# Altium PCB LedModulePCB.PcbDoc
Units mm, origin at the board's own origin, x right, y up, seen from the top; angles counter-clockwise.
Board outline 67.44 x 43.06 mm, 2 copper layers (Top Layer, Bottom Layer); 54 components, 37 nets, 191 pads, 19 vias.
Unrouted connection lines stored in the file: 124.
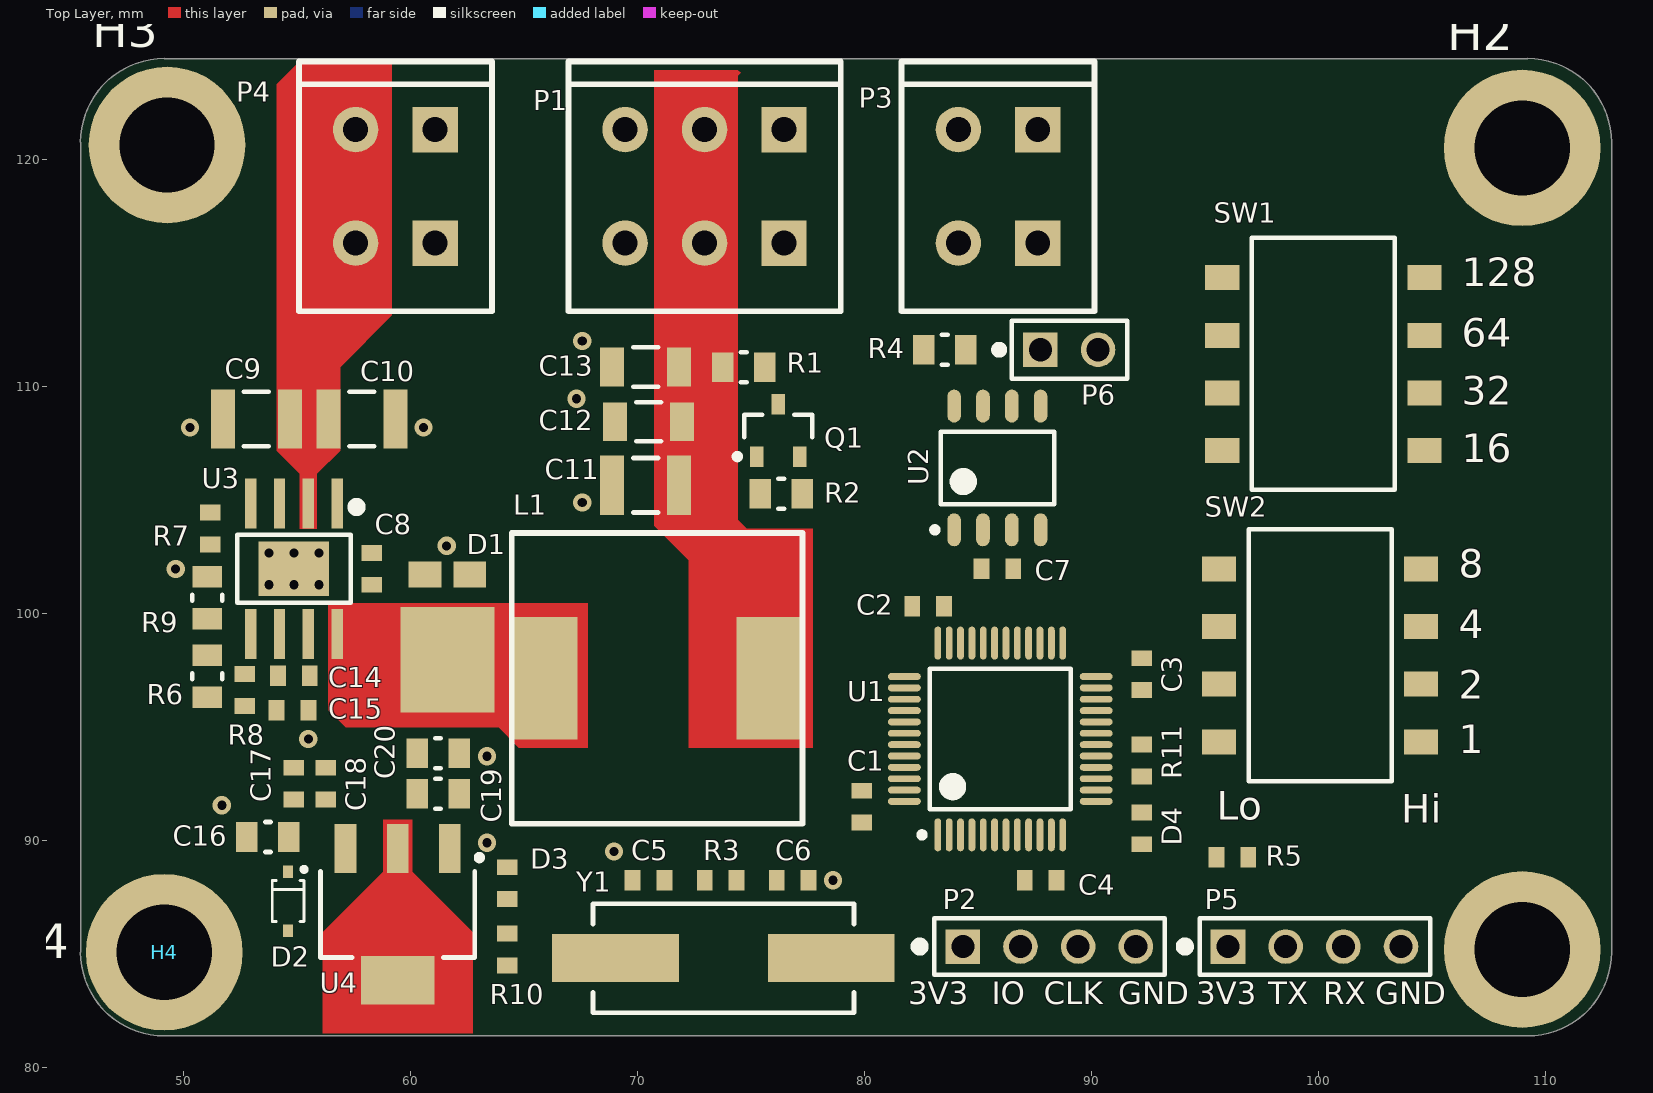
[diagram p0: Top Layer view]
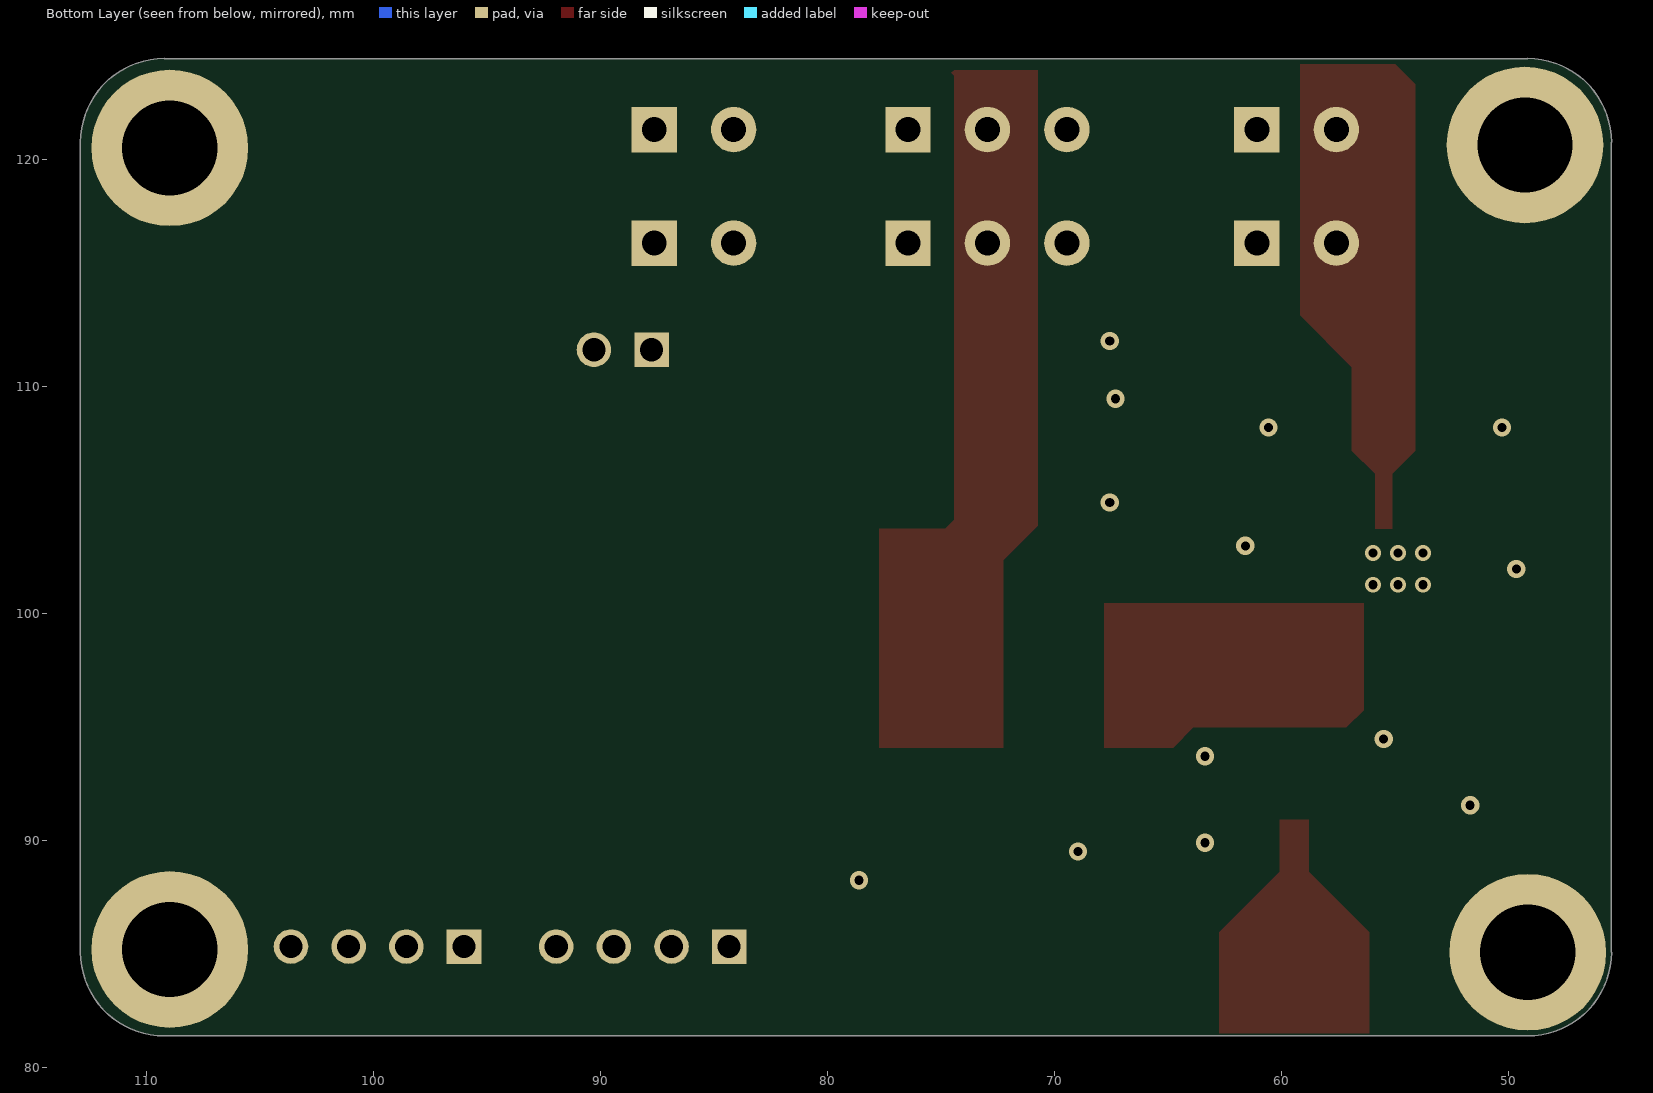
[diagram p1: Bottom Layer view, seen from below]

## Layer stack, top to bottom
Top Solder: solder mask 0.0102, Solder Resist, Dk 3.5
Top Layer: signal copper 0.0356
Dielectric 1: dielectric 0.32, FR-4, Dk 4.8
Bottom Layer: signal copper 0.0356
Bottom Solder: solder mask 0.0102, Solder Resist, Dk 3.5

## Board outline
45.466,85.09 45.466,120.777 45.464,120.777 cw(c49.149,120.777) 49.149,124.462 49.149,124.46 109.218,124.46 109.218,124.462 cw(c109.218,120.777) 112.903,120.777 112.903,85.09 cw(c109.218,85.09) 109.218,81.405 109.22,81.407 49.149,81.407 49.149,81.405 cw(c49.149,85.09)

## Design rules (kind name [scope] priority, off if disabled: settings)
Clearance [All] p1: gap=0.254 ignorepadtopadclearanceinfootprint=FALSE except(0: Arc-Hole Track-Hole SMDPad-Hole THPad-Hole Via-Hole Fill-Hole Poly-Hole Region-Hole Text-Hole; 0.152: Arc-Arc Arc-Track Arc-SMDPad Arc-THPad Arc-Via Track-Track Track-SMDPad Track-THPad Track-Via SMDPad-SMDPad SMDPad-THPad SMDPad-Via THPad-THPad THPad-Via Via-Via)
PolygonConnect [All] p1: connectstyle=Relief reliefconductorwidth=0.254 reliefentries=4 polygonreliefangle="90 Angle" airgapwidth=0.254
RoutingVias [All] p1: holewidth=0.711 width=1.27 viastyle="Through Hole" minholewidth=0.711 minwidth=1.27 maxholewidth=0.711 maxwidth=1.27
SolderMaskExpansion [All] p1: expansion=0.102
Width [All] p1: maxlimit=0.254 minlimit=0.254 preferedwidth=0.254
30 further rules are at their usual default settings.

## Classes and differential pairs
component class LedModulePower: C8 C9 C10 C11 C12 C13 C14 C15 C16 C17 C18 C19 C20 D1 D2 D3 H1 H2 H3 H4 L1 P4 R6 R7 R8 R9 R10 U3 U4
component class LedModuleMicrocontroller: C1 C2 C3 C4 C5 C6 C7 D4 P1 P2 P3 P5 P6 Q1 R1 R2 R3 R4 R5 R11 SW1 SW2 U1 U2 Y1

## Components (designator, comment, footprint, x,y, rotation, side; value= is the part's Value field where it differs from the comment)
C1 "cap_single_np" chip_0603 79.883,91.505 r270 top
C2 "cap_single_np" chip_0603 82.804,100.33 r0 top
C3 "cap_single_np" chip_0603 92.202,97.344 r270 top
C4 "cap_single_np" chip_0603 87.757,88.265 r180 top
C5 "cap_single_np" chip_0603 70.485,88.265 r180 top
C6 "cap_single_np" chip_0603 76.835,88.265 r180 top
C7 "cap_single_np" chip_0603 85.852,101.981 r0 top
C8 "cap_single_np" chip_0603 58.293,101.981 r270 top
C9 "cap_single_np" chip_1210 53.213,108.585 r180 top
C10 "cap_single_np" chip_1210 57.863,108.585 r0 top
C11 "cap_single_np" chip_1210 70.358,105.664 r180 top
C12 "cap_single_np" chip_1206 70.485,108.458 r180 top
C13 "cap_single_np" chip_1206 70.358,110.871 r180 top
C14 "cap_single_np" chip_0603 54.864,97.282 r0 top
C15 "cap_single_np" chip_0603 54.802,95.758 r0 top
C16 "cap_single_np" chip_0805 53.721,90.17 r180 top
C17 "cap_single_np" chip_0603 54.864,92.518 r90 top
C18 "cap_single_np" chip_0603 56.261,92.518 r90 top
C19 "cap_single_np" chip_0805 61.214,92.075 r0 top
C20 "cap_single_np" chip_0805 61.214,93.853 r0 top
D1 "diode_sch_A12C3" TO-277-3 61.626,98.977 r90 top
D2 "diode_2" sod323_0 54.61,87.346 r270 top
D3 "diode_4" chip_0603 64.262,88.138 r270 top
D4 "diode_4" chip_0603 92.202,90.551 r90 top
H1 "mounting_hole_0" #8-32_SOCKET_HEAD 108.966,85.217 r0 top
H2 "mounting_hole_0" #8-32_SOCKET_HEAD 108.966,120.523 r0 top
H3 "mounting_hole_0" #8-32_SOCKET_HEAD 49.276,120.65 r0 top
H4 "mounting_hole_0" #8-32_SOCKET_HEAD 49.149,85.09 r0 top
L1 "ind_0" 7447709150 75.813,97.155 r90 top
P1 "conn-3x1_0" TERM_3.50MM_3x1_0 76.454,121.332 r180 top
P2 "conn-4x1_0" HDDR_4x1_0 84.328,85.344 r0 top
P3 "conn-2x1_0" TERM_3.50MM_2x1_0 87.63,121.332 r180 top
P4 "conn-2x1_0" TERM_3.50MM_2x1_0 61.087,121.332 r180 top
P5 "conn-4x1_0" HDDR_4x1_0 96.012,85.344 r0 top
P6 "conn-2x1_0" hddr_2x1_0 89.027,111.633 r0 top
Q1 "n-mosfet_1" sot-23-3 76.2,108.077 r90 top
R1 "res_single" chip_0805 74.676,110.871 r0 top
R2 "res_single" chip_0805 76.327,105.283 r0 top
R3 "res_single" chip_0603 73.66,88.265 r0 top
R4 "res_single" chip_0805 83.53,111.633 r0 top
R5 "res_single" chip_0603 96.204,89.281 r0 top
R6 "res_single" chip_0805 51.054,97.246 r90 top
R7 "res_single" chip_0603 51.181,103.759 r270 top
R8 "res_single" chip_0603 52.705,96.647 r270 top
R9 "res_single" chip_0805 51.054,100.711 r90 top
R10 "res_single" chip_0603 64.262,85.217 r90 top
R11 "res_single" chip_0603 92.202,93.537 r90 top
SW1 "DIP_SW_4" A6S-4104-H 95.758,114.808 r0 top
SW2 "DIP_SW_4" A6S-4104-H 95.621,101.981 r0 top
U1 "STM32F103C8" LQFP48_0 85.979,94.488 r90 top
U2 "SN65HVD232" SO-8 85.852,106.426 r90 top
U3 "TPS54360" SO-8_PPAD 54.864,101.981 r270 top
U4 "LM1117" sot-223-4 59.436,86.762 r270 top
Y1 "osc_xtal_2p_0" ABLS_AT49_OSC 73.787,84.836 r0 top

## Footprints (in the part's own frame and the unit in brackets; to place one, negate y for a bottom-side part, rotate by r counter-clockwise, add the part's x,y. Pads: shape width x height; smd on the part's side, far side on the other; paste and mask are expansions set on the pad)
7447709150 [mm] "Fixed Inductor 7447709150"
  rect 5.4x2.9 smd: 1(0,9.9) 2(0,0)
  silkscreen extent -6.4,-1.45 6.4,11.35
#8-32_SOCKET_HEAD [mm] "Mounting hole for #8-32 socket head cap screw"
  round 6.9 hole 4.2: 0(0,0)
A6S-4104-H [mm]
  rect 1.5x1.1 smd: 1(0,0) 2(0,-2.54) 3(0,-5.08) 4(0,-7.62) 5(8.9,-7.62) 6(8.9,-5.08) 7(8.9,-2.54) 8(8.9,0)
  silkscreen extent 1.3,-9.35 7.6,1.75, body extent -0.45,-9.35 9.35,1.75, height 4.4
ABLS_AT49_OSC [mil] "ABLS Crystal Oscillator"
  rect 220x83 smd: 1(-187.01,0) 2(186.99,0)
  silkscreen extent -226,-94 226,94, body extent -224,-94 224,94, height 157
chip_0603 [mm]
  rect 0.7x0.9 smd: 1(-0.7,0) 2(0.7,0)
  body extent -0.85,-0.45 0.85,0.45, height 0.6
chip_0805 [mm]
  rect 0.95x1.3 smd: 1(-0.925,0) 2(0.925,0)
  silkscreen extent -0.13,-0.66 0.13,0.66, body extent -1.05,-0.65 1.05,0.65, height 0.6
chip_1206 [mm]
  rect 1.05x1.7 smd: 1(-1.475,0) 2(1.475,0)
  silkscreen extent -0.55,-0.86 0.55,0.86, body extent -1.65,-0.85 1.65,0.85, height 0.6
chip_1210 [mm]
  rect 1.05x2.6 smd: 1(-1.475,0) 2(1.475,0)
  silkscreen extent -0.55,-1.2 0.55,1.2, body extent -1.65,-1.3 1.65,1.3, height 0.6
hddr_2x1_0 [mil] "0.1\" Header 2x1"
  rect 60x60 hole 40: 1(-50.39,0)
  round 60 hole 40: 2(49.61,0)
  silkscreen extent -128,-50 100,50, body extent -100,-50 100,50, height 336
HDDR_4x1_0 [mil]
  rect 60x60 hole 40: 1(0,0)
  round 60 hole 40: 2(100,0) 3(200,0) 4(300,0)
  silkscreen extent -83,-49 350,49, body extent -50,-50 350,50, height 336
LQFP48_0 [mm] "LQFP48, 7.00x7.00mm, 0.50mm"
  oval 1.45x0.3 smd: 1(-4.225,2.75) 2(-4.225,2.25) 3(-4.225,1.75) 4(-4.225,1.25) 5(-4.225,0.75) 6(-4.225,0.25) 7(-4.225,-0.25) 8(-4.225,-0.75) 9(-4.225,-1.25) 10(-4.225,-1.75) 11(-4.225,-2.25) 12(-4.225,-2.75) 25(4.225,-2.75) 26(4.225,-2.25) 27(4.225,-1.75) 28(4.225,-1.25) 29(4.225,-0.75) 30(4.225,-0.25) 31(4.225,0.25) 32(4.225,0.75) 33(4.225,1.25) 34(4.225,1.75) 35(4.225,2.25) 36(4.225,2.75)
  oval 0.3x1.45 smd: 13(-2.75,-4.225) 14(-2.25,-4.225) 15(-1.75,-4.225) 16(-1.25,-4.225) 17(-0.75,-4.225) 18(-0.25,-4.225) 19(0.25,-4.225) 20(0.75,-4.225) 21(1.25,-4.225) 22(1.75,-4.225) 23(2.25,-4.225) 24(2.75,-4.225) 37(2.75,4.225) 38(2.25,4.225) 39(1.75,4.225) 40(1.25,4.225) 41(0.75,4.225) 42(0.25,4.225) 43(-0.25,4.225) 44(-0.75,4.225) 45(-1.25,4.225) 46(-1.75,4.225) 47(-2.25,4.225) 48(-2.75,4.225)
  silkscreen extent -4.35,-3.1 3.1,3.57, body extent -3.5,-3.5 3.5,3.5, height 1.6
SO-8 [mm] "SO-8 Package"
  oval 1.45x0.6 smd: 1(-2.725,1.905) 2(-2.725,0.635) 3(-2.725,-0.635) 4(-2.725,-1.905) 5(2.725,-1.905) 6(2.725,-0.635) 7(2.725,0.635) 8(2.725,1.905)
  silkscreen extent -2.85,-2.5 1.6,2.88, body extent -3.08,-2.5 3.08,2.5, height 2
SO-8_PPAD [mm]
  rect 2.2x0.5 smd: 1(-2.875,1.905) 2(-2.875,0.635) 3(-2.875,-0.635) 4(-2.875,-1.905) 5(2.875,-1.905) 6(2.875,-0.635) 7(2.875,0.635) 8(2.875,1.905)
  rect 2.4x3.1 smd: 9(0,0)
  silkscreen extent -2.92,-2.5 1.5,2.96, body extent -3.08,-2.5 3.08,2.5, height 2
sod323_0 [mm] "SOD-323, 1.25mm x 1.7mm"
  rect 0.55x0.45 smd: 1(-1.3,0) 2(1.3,0)
  silkscreen extent -1.5,-0.7 0.9,0.8, body extent -0.9,-0.67 0.9,0.67, height 1
sot-23-3 [mm] "SOT-23-3 package"
  rect 0.9x0.6 smd: 1(-1.15,0.95) 2(-1.15,-0.95) 3(1.15,0)
  silkscreen extent -1.27,-1.5 0.7,1.92, body extent -1.42,-1.5 1.42,1.5, height 1.2
sot-223-4 [mm]
  rect 2.15x0.95 smd: 1(-2.9,2.3) 2(-2.9,0) 3(-2.9,-2.3)
  rect 2.15x3.25 smd: 4(2.9,0)
  silkscreen extent -2.62,-3.4 1.9,3.73, body extent -1.9,-3.4 1.9,3.4, height 1.1
TERM_3.50MM_2x1_0 [mm] "Terminal Block, 3.5mm pitch"
  rect 2x2 hole 1.1: 1(0,5) 1(0,0)
  round 2 hole 1.1: 2(3.5,5) 2(3.5,0)
  silkscreen extent -2.5,-3 6,8, body extent -2.5,-3 6,8, height 8.98
TERM_3.50MM_3x1_0 [mm]
  rect 2x2 hole 1.1: 1(0,5) 1(0,0)
  round 2 hole 1.1: 2(3.5,5) 2(3.5,0) 3(7,0) 3(7,5)
  silkscreen extent -2.5,-3 9.5,8, body extent -2.5,-3 9.5,8, height 8.98
TO-277-3 [mm] "TO-277 3-pin"
  rect 1.15x1.45 smd: 1(2.75,0.985) 2(2.75,-0.985)
  rect 4.65x4.15 smd: 3(-1,0)

## Part data
C1 C2 C3 C4 C7 C8: library part CAP-00542, "CAP, 0.1uF, ±10%, 16V, X7R, 0603", Capacitance=0.1uF, Manufacturer=Murata, Tolerance=±10%, Voltage Rating=16V, Part Number=CAP-00542, Type=X7R
C5 C6: library part CAP-00409, "CAP, 18pF, ±2%, 50V, C0G, 0603", Capacitance=18pF, Manufacturer=Murata, Manufacturer PN=GRM1885C1H180GA01D, Tolerance=±2%, Voltage Rating=50V, Part Number=CAP-00409, Type=C0G
C9 C10: library part CAP-00554, "CAP, 10uF, ±10%, 63V, X7R, 1210", Capacitance=10uF, Manufacturer="Samsung Electro-Mechanics", Manufacturer PN=CL32B106KMVNNWE, Tolerance=±10%, Voltage Rating=63V, Cost=0.81, Part Number=CAP-00554, Type=X7R
C11: library part CAP-00557, "CAP, 47uF, ±20%, 6.3V, X7R, 1210", Capacitance=47uF, Manufacturer=KEMET, Manufacturer PN=C1210C476M9RACTU, Tolerance=±20%, Voltage Rating=6.3V, Cost=$1.08, Part Number=CAP-00557, Type=X7R
C12 C13: library part CAP-00539, "CAP, 10uF, ±10%, 25V, X7R, 1206", Capacitance=10uF, Manufacturer=Samsung, Manufacturer PN=CL31B106KAHNNNE, Tolerance=±10%, Voltage Rating=25V, Part Number=CAP-00539, Type=X7R
C14: library part CAP-00452, "CAP, 36pF, ±2%, 50V, C0G, 0603", Capacitance=36pF, Manufacturer=Murata, Manufacturer PN=GRM1885C1H360GA01D, Tolerance=±2%, Voltage Rating=50V, Part Number=CAP-00452, Type=C0G
C15: library part CAP-00465, "CAP, 1000pF, ±2%, 50V, C0G, 0603", Capacitance=1000pF, Manufacturer=Murata, Manufacturer PN=GRM1885C1H102GA01D, Tolerance=±2%, Voltage Rating=50V, Part Number=CAP-00465, Type=C0G
C16 C20: library part CAP-00107, "CAP, 1uF, 10%, 16V, X7R, 0805", Capacitance=1uF, Manufacturer=Murata, Manufacturer PN=GRM21BR71C105KA01L, Tolerance=10%, Voltage Rating=16V, Part Number=CAP-00107, Type=X7R
C17: library part CAP-00530, "CAP, 0.1uF, ±10%, 100V, X7R, 0603", Capacitance=0.1uF, Manufacturer=Murata, Manufacturer PN=GRM188R72A104KA35J, Tolerance=±10%, Voltage Rating=100V, Part Number=CAP-00530, Type=X7R
C18: library part CAP-00524, "CAP, 0.022uF, ±10%, 100V, X7R, 0603", Capacitance=0.022uF, Manufacturer=Murata, Manufacturer PN=GRM188R72A223KAC4D, Tolerance=±10%, Voltage Rating=100V, Part Number=CAP-00524, Type=X7R
C19: library part CAP-00131, "CAP, 10uF, 10%, 10V, X7R, 0805", Capacitance=10uF, Manufacturer=Murata, Manufacturer PN=GRM21BR71A106KA73L, Tolerance=10%, Voltage Rating=10V, Part Number=CAP-00131, Type=X7R
D1: library part DIO-00054, "Dio, Schottky, 15A, 0.85V, 150V, TO-227", Current Rating=15A, Forward Voltage=0.85V, Manufacturer="ON Semi", Manufacturer PN=FSV15150V, Reverse Breakdown Voltage=150V, Cost=0.82, Part Number=DIO-00054, Type=Schottky
D2: library part DIO-00000, "Dio Shtky, 500mA, 0.62V, 30V, SOD-323", Current Rating=500mA, Forward Voltage=620mV, Manufacturer="ON Semi", Manufacturer PN=NSR0530HT1G, Reverse Breakdown Voltage=30V, Part Number=DIO-00000, Type=Schottky
D3 D4: library part DIO-00049, "LED, Blue, 0603, Low current, HELI2 Series", Current Rating=30mA, Forward Voltage=2.65V, Manufacturer=Kingbright, Manufacturer PN=APT1608LVBC/D, Power Rating=120mW, Reverse Breakdown Voltage=5V, Cost=0.58, Part Number=DIO-00049, Type=LED
H1 H2 H3 H4: library part MISC-00027, "#8-32 Mounting Hole for Socket Head Cap Screw", Part Number=MISC-00027
L1: library part MAG-00090, "Ind, 15uH, 0.2, 6.5A, 7447709150", Current Rating=6.5A, Inductance=15uH, Manufacturer=Wurth, Manufacturer PN=7447709150, Tolerance=0.2, Cost=2.41, DCR="26 mOhm", Part Number=MAG-00090
P1: library part CONN-00022, "Term Blk, 3 Pos, 16A, 3.5mm Pitch", Current=16, Manufacturer="Phoenix Contact", Manufacturer PN=1861946, Cost=1.19, Levels=1, Part Number=CONN-00022, Positions per level=3, Type="Terminal Block"
P2 P5: library part CONN-00029, "Header 4x1, 0.1\"", Levels=1, Part Number=CONN-00029, Positions per level=4, Type=Header
P3 P4: library part CONN-00023, "Term Blk, 2 Pos, 16A, 3.5mm Pitch", Current=16, Manufacturer="Phoenix Contact", Manufacturer PN=1861933, Cost=0.79, Levels=1, Part Number=CONN-00023, Positions per level=2, Type="Terminal Block"
P6: library part CONN-00055, "Header, 2x1, 0.1\"", Manufacturer=Samtec, Manufacturer PN=TSW-102-07-F-S, Cost=0.2, Levels=1, Part Number=CONN-00055, Positions per level=2, Type=Header
Q1: library part XSTR-00017, "XSTR NMOS, 220mA, 50V, Vgs 1.3V, SOT-23-3", Manufacturer="ON Semi", Manufacturer PN=BSS138, Max Current=220mA, Max Power=360mW, Max Voltage=50V, Cost=0.31, Part Number=XSTR-00017, Type=NFET, Vgs/Vce=1.3V
R1: library part RES-00471, "RES SMD 4.7K OHM 1% 1/8W 0805", Manufacturer="Rohm Semiconductor", Manufacturer PN=KTR10EZPF4701, Power Rating=0.125W, Resistance=4.7k, Tolerance=1%, Part Number=RES-00471
R2: library part RES-00307, "RES SMD 10K OHM 1% 1/8W 0805", Manufacturer="Rohm Semiconductor", Manufacturer PN=KTR10EZPF1002, Power Rating=0.125W, Resistance=10k, Tolerance=1%, Part Number=RES-00307
R3: library part RES-00362, "RES SMD 1M OHM 1% 1/4W 0603", Manufacturer=Panasonic, Manufacturer PN=ERJ-PA3F1004V, Power Rating=0.25W, Resistance=1M, Tolerance=1%, Part Number=RES-00362
R4: library part RES-00183, "RES SMD 120 OHM 1% 1/8W 0805", Manufacturer="Rohm Semiconductor", Manufacturer PN=KTR10EZPF1200, Power Rating=0.125W, Resistance=120, Tolerance=1%, Part Number=RES-00183
R5 R10 R11: library part RES-00221, "RES SMD 330 OHM 1% 1/4W 0603", Manufacturer=Panasonic, Manufacturer PN=ERJ-PA3F3300V, Power Rating=0.25W, Resistance=330, Tolerance=1%, Part Number=RES-00221
R6: library part RES-00554, "RES SMD 75K OHM 1% 1/8W 0805", Manufacturer="Rohm Semiconductor", Manufacturer PN=KTR10EZPF7502, Power Rating=0.125W, Resistance=75k, Tolerance=1%, Part Number=RES-00554
R7: library part RES-00405, "RES SMD 270K OHM 1% 1/4W 0603", Manufacturer=Panasonic, Manufacturer PN=ERJ-PA3F2703V, Power Rating=0.25W, Resistance=270k, Tolerance=1%, Part Number=RES-00405
R8: library part RES-00399, "RES SMD 24K OHM 1% 1/4W 0603", Manufacturer=Panasonic, Manufacturer PN=ERJ-PA3F2402V, Power Rating=0.25W, Resistance=24k, Tolerance=1%, Part Number=RES-00399
R9: library part RES-00309, "RES SMD 11.5K OHM 1% 1/8W 0805", Manufacturer="Rohm Semiconductor", Manufacturer PN=KTR10EZPF1152, Power Rating=0.125W, Resistance=11.5k, Tolerance=1%, Part Number=RES-00309
SW1 SW2: library part MISC-00026, "DIP Switch, SMD, 25mA, 24V", Manufacturer=Omron, Manufacturer PN=A6S-4104-H, Cost=1.51, Part Number=MISC-00026
U1: library part UCTRL-00008, "STM32 M3, LQFP-48", Manufacturer=ST, Manufacturer PN=STM32F103C8, Part Number=UCTRL-00008
U2: library part IFACE-00008, "CANbus Transceiver, Single channel, SN65HVD232", Manufacturer=TI, Manufacturer PN=SN65HVD232DR, Cost=2.01, Part Number=IFACE-00008
U3: library part PWREG-00017, "REG, SW Buck Adj, 3.5A, 4.5-60V, 2.5MHz", Frequency=100kHz-2.5MHz, Manufacturer=TI, Manufacturer PN=TPS54360DDAR, Max Current=4.5A, Voltage Range In="4.5 - 60V", Voltage Range Out="0.8 - 58.8V", Cost=5.11, Fixed/Adj=Adj, Part Number=PWREG-00017, Reg Type="SW Buck"
U4: library part PWREG-00018, "REG, Linear, Fixed 3V3, 800mA, SOT-223", Manufacturer=TI, Manufacturer PN=LM1117MPX-3.3/NOPB, Max Current=800mA, Voltage Range In="4.5 - 15V", Voltage Range Out=3.3V, Cost=1.14, Fixed/Adj=Fixed, Part Number=PWREG-00018, Reg Type=Linear
Y1: library part OSC-00002, "XTAL, 8MHz, 18pF, 20ppm", Frequency=8.000M, Load Capacitance=18pF, Manufacturer=Abracon, Manufacturer PN=ABLS-8.000MHZ-B2-T, Tolerance=20ppm, ESR=80, Part Number=OSC-00002, Stability=50ppm

## Via types
v1: diameter 0.8, hole 0.4, Top Layer to Bottom Layer, 13 vias
v2: diameter 0.7, hole 0.4, Top Layer to Bottom Layer, 6 vias

## Nets (pads, with @x,y where several pads share a name; then routed paths per layer and width w, separated by ;. In a path a pad name is that pad's centre, name@x,y a point inside that pad or via, vN(x,y) a via of type N, cw(c..) or ccw(c..) an arc to the next point about the centre after c; other vN are vias at no path point)
3V3: C1.1 C2.1 C3.1 C4.1 C7.2 C19.1 C20.1 D2.2 P2.1 P5.1 Q1.1 R2.1 R5.1 R10.1 U1.1 U1.9 U1.24 U1.36 U1.48 U2.3 U4.2 U4.4
+6: C11.1 C12.1 C13.1 C16.1 C17.1 C18.1 D2.1 L1.2 P1.2 R1.1 R6.1 U4.3
+24: C9.1 C10.1 P4.2 U3.2
BOOT1: U1.20
CAN_ID_1: SW2.4 U1.10
CAN_ID_2: SW2.3 U1.11
CAN_ID_4: SW2.2 U1.12
CAN_ID_8: SW2.1 U1.13
CAN_ID_16: SW1.4 U1.14
CAN_ID_32: SW1.3 U1.15
CAN_ID_64: SW1.2 U1.16
CAN_ID_128: SW1.1 U1.17
CAN_LED: R11.2 U1.18
DI_3V3: Q1.2 R2.2 U1.28
GND: C1.2 C2.2 C3.2 C4.2 C5.2 C6.1 C7.1 C9.2 C10.2 C11.2 C12.2 C13.2 C14.2 C15.2 C16.2 C17.2 C18.2 C19.2 C20.2 D1.1 D1.2 D3.1 D4.1 H1.0 H2.0 H3.0 H4.0 P1.3 P2.4 P4.1 P5.4 R7.2 R9.2 U1.8 U1.23 U1.35 U1.44 U1.47 U2.2 U3.7 U3.9 U4.1
  other v1: 78.613,88.265 68.961,89.535 50.292,108.204 60.579,108.204
  other v2: 53.764,101.281 54.864,101.281 55.964,101.281 53.764,102.681 54.864,102.681 55.964,102.681
NetC5_1: C5.1 R3.1 U1.5 Y1.1
NetC6_2: C6.2 R3.2 U1.6 Y1.2
NetC8_1: C8.1 U3.1
NetC8_2: C8.2 D1.3 L1.1 U3.8
NetC14_1: C14.1 R8.1 U3.6
NetC15_1: C15.1 R8.2
NetD3_2: D3.2 R10.2
NetD4_2: D4.2 R11.1
NetP1_1: P1.1 Q1.3 R1.2
NetP3_1: P3.1 P6.2 U2.6
NetP3_2: P3.2 R4.1 U2.7
NetP6_1: P6.1 R4.2
NetR5_2: R5.2 SW1.5 SW1.6 SW1.7 SW1.8 SW2.5 SW2.6 SW2.7 SW2.8
NetR6_2: R6.2 R9.1 U3.5
NetR7_1: R7.1 U3.4
RESET: U1.7
RX: U1.32 U2.4
SWDCLK: P2.3 U1.37
SWDIO: P2.2 U1.34
TX: U1.33 U2.1
UART_RX: P5.3 U1.31
UART_TX: P5.2 U1.30
pads on no net: U1.2 U1.3 U1.4 U1.19 U1.21 U1.22 U1.25 U1.26 U1.27 U1.29 U1.38 U1.39 U1.40 U1.41 U1.42 U1.43 U1.45 U1.46 U2.5 U2.8 U3.3
copper on no net:
  other v1: 63.373,89.916 51.689,91.567 63.373,93.726 55.499,94.488 49.657,101.981 61.595,102.997 67.564,104.902 67.31,109.474 67.564,112.014

## Other copper
Top Layer:
  region: 79.248,107.061
  region: 79.248,106.807
  region net +6: 77.724,94.107 72.263,94.107 72.263,102.362 70.739,103.886 70.739,123.952 74.422,123.952 74.549,123.825 74.422,123.698 74.422,104.14 74.803,103.759 77.724,103.759
  region: 74.803,94.361
  region net NetC8_2: 56.388,100.457 56.388,95.758 57.15,94.996 63.881,94.996 64.77,94.107 67.818,94.107 67.818,100.457
  region net 3V3: 56.134,81.534 56.134,85.979 58.801,88.646 58.801,90.932 60.071,90.932 60.071,88.646 62.738,85.979 62.738,81.534
  region net +24: 55.118,103.759 55.118,106.172 54.102,107.188 54.102,123.317 54.991,124.206 59.182,124.206 59.182,113.157 56.896,110.871 56.896,107.188 55.88,106.172 55.88,103.759

## Silkscreen, mask and mechanical layers (free items; w line width, h text height)
Top Overlay:
  text "128" at 106.299,114.427 h1.25
  text "64" at 106.299,111.76 h1.25
  text "32" at 106.299,109.22 h1.25
  text "16" at 106.299,106.68 h1.25
  text "8" at 106.172,101.6 h1.25
  text "4" at 106.172,98.933 h1.25
  text "2" at 106.172,96.266 h1.25
  text "1" at 106.172,93.853 h1.25
  text "Lo" at 95.504,90.932 h1.25
  text "Hi" at 103.632,90.805 h1.25
  text "3V3" at 81.915,82.804 h1
  text "IO" at 85.598,82.804 h1
  text "CLK" at 87.884,82.804 h1
  text "GND" at 91.186,82.804 h1
  text "3V3" at 94.615,82.804 h1
  text "TX" at 97.79,82.804 h1
  text "RX" at 100.203,82.804 h1
  text "GND" at 102.489,82.804 h1
Mechanical 1:
  lines w0.05: 45.464,85.09 ccw(c49.149,85.09) 49.149,81.405 ; 45.464,120.777 cw(c49.149,120.777) 49.149,124.462 ; 45.466,85.09 45.466,120.777 ; 49.149,81.407 109.22,81.407 ; 49.149,124.46 109.218,124.46 ; 109.218,81.405 ccw(c109.218,85.09) 112.903,85.09 112.903,120.777 ccw(c109.218,120.777) 109.218,124.462